# Altium PCB MOTHERBOARD.PcbDoc (part 1 of 3)
Units mm, origin at the board's own origin, x right, y up, seen from the top; angles counter-clockwise.
Board outline 187.14 x 77.14 mm, 4 copper layers (Top Layer, Top, Mid-Layer 1, Mid-Layer 2, Bottom Layer, Bottom), stack 0.462 mm thick; 249 components, 227 nets, 1108 pads, 518 vias.
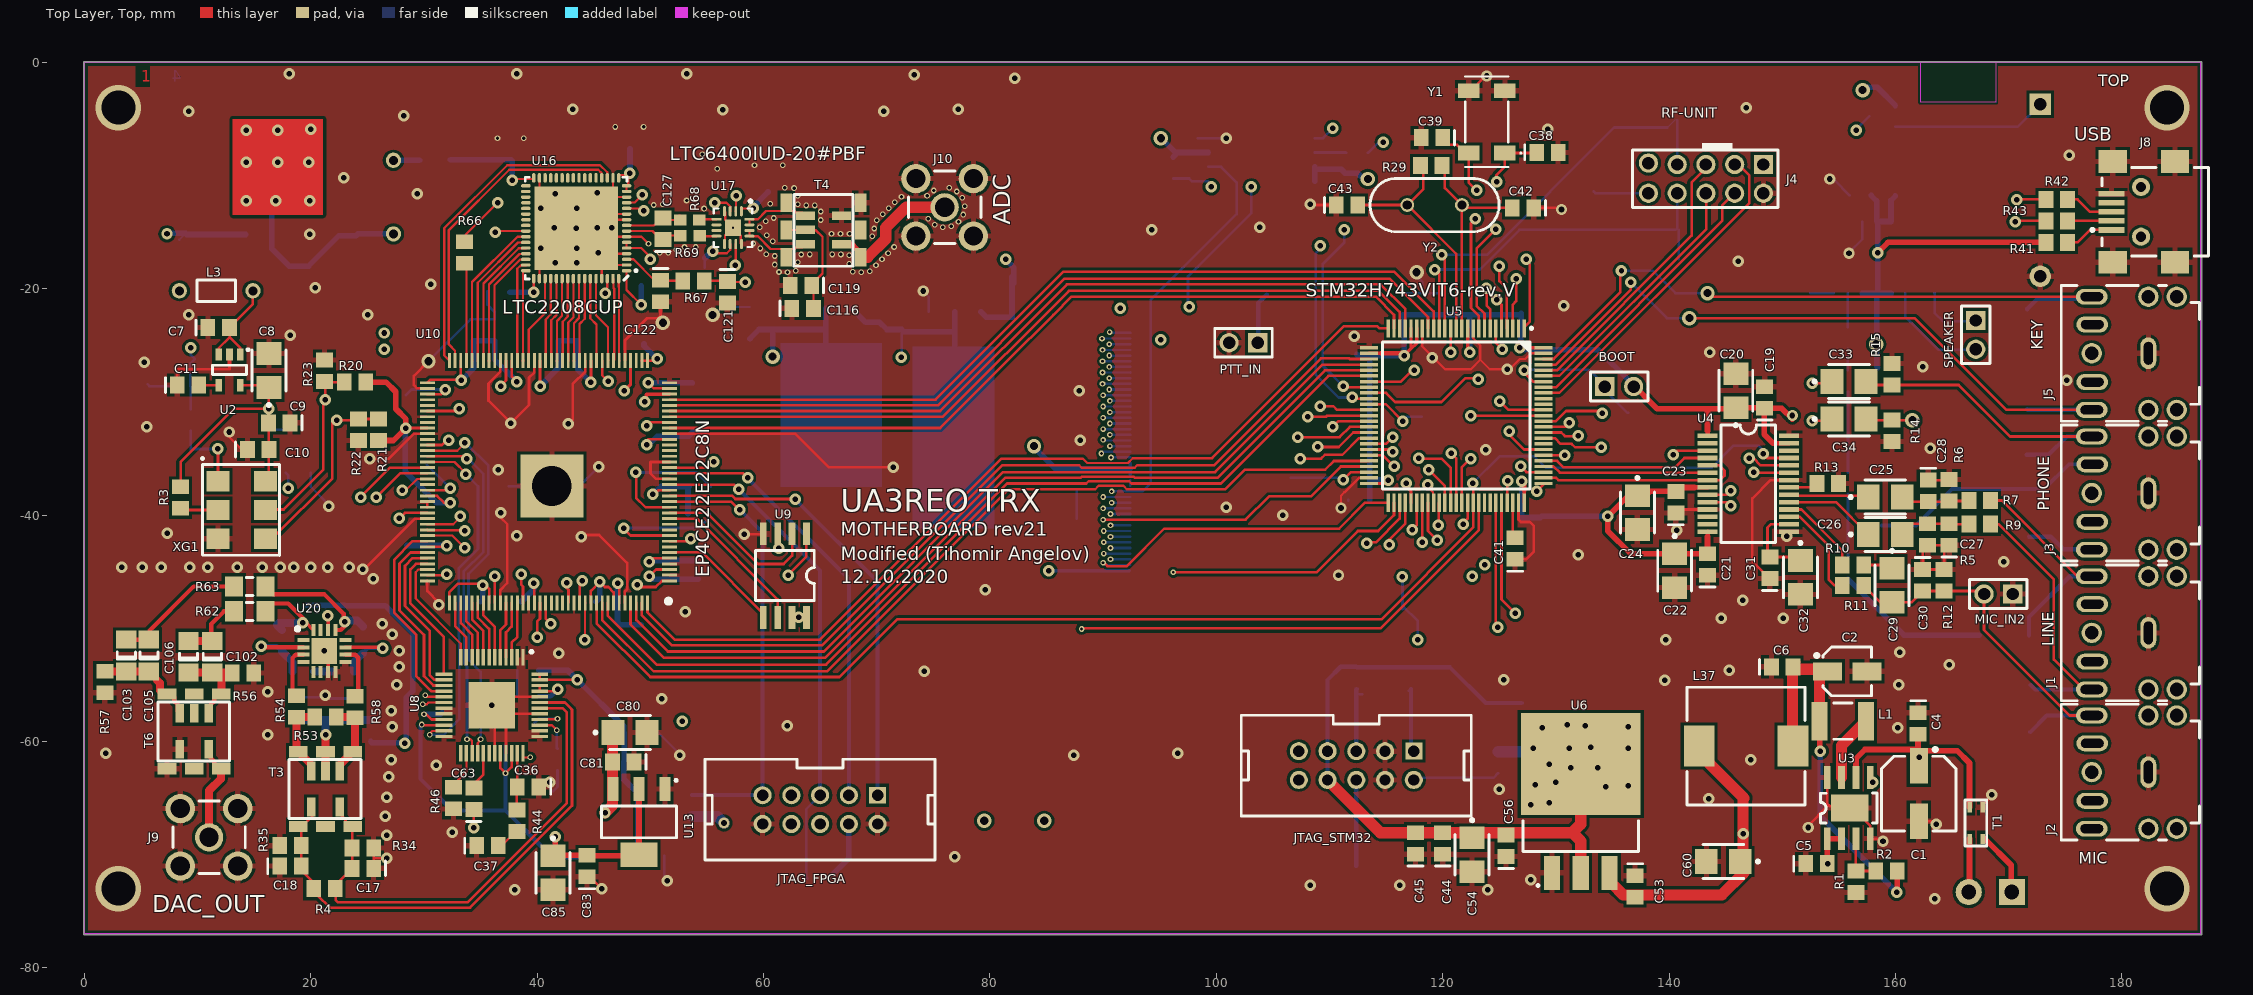
[diagram p0: Top Layer, Top view]
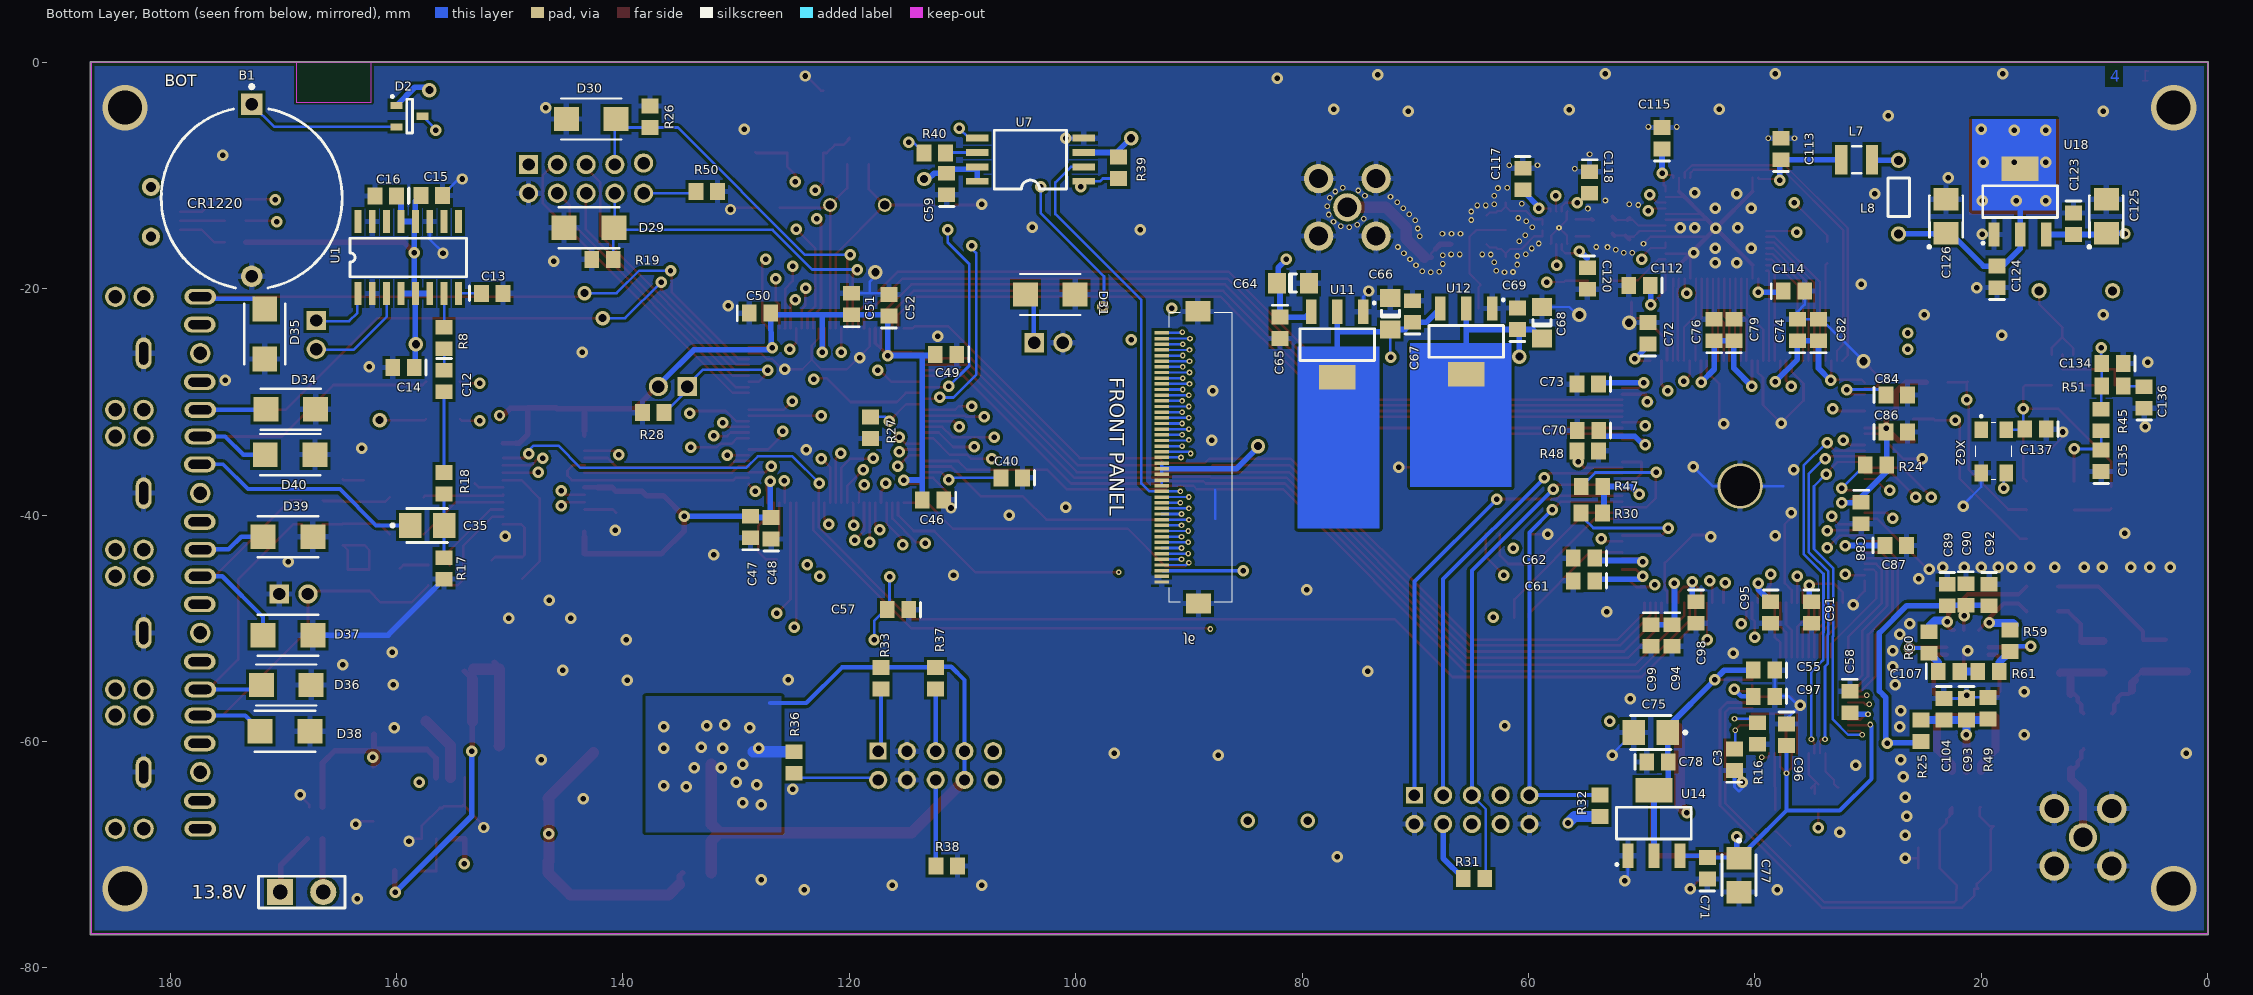
[diagram p1: Bottom Layer, Bottom view, seen from below]
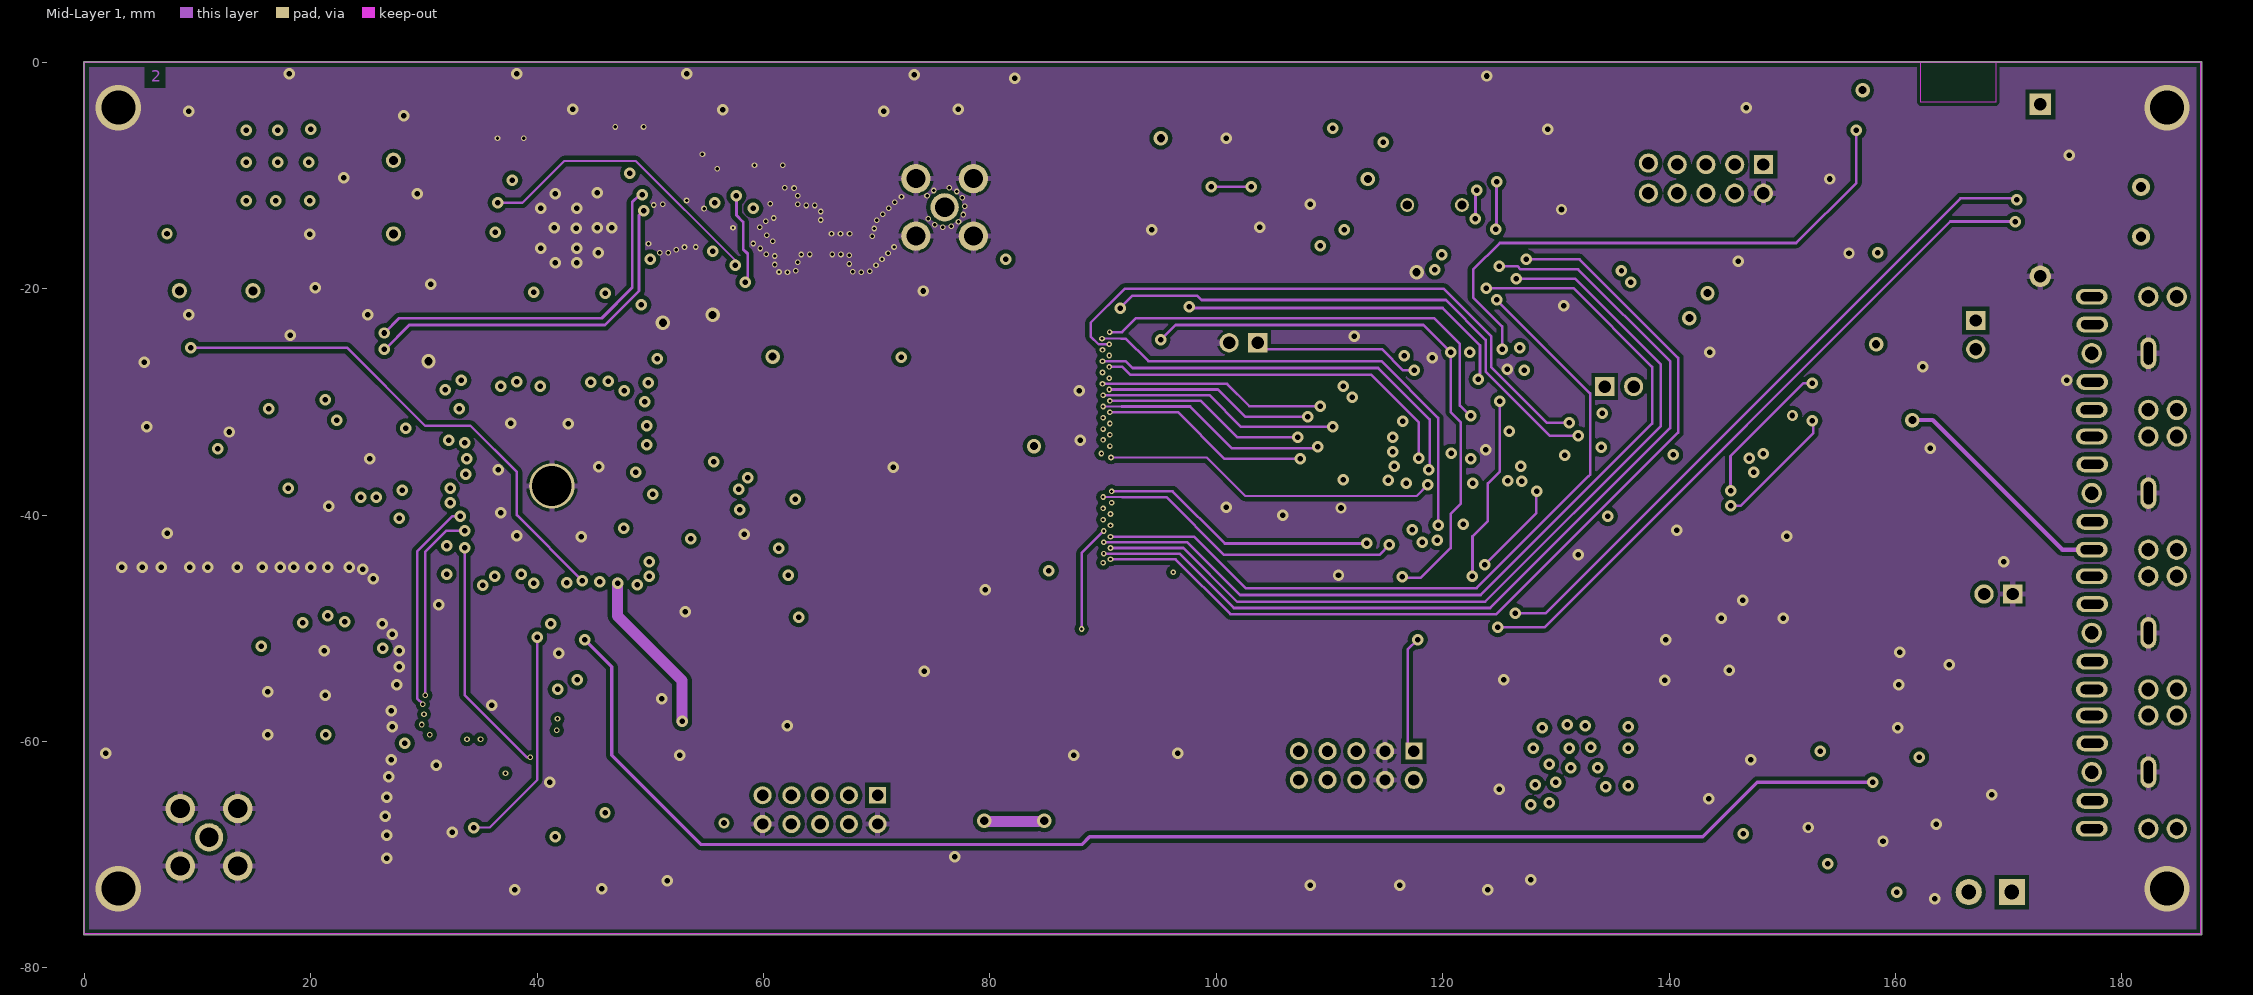
[diagram p2: Mid-Layer 1]
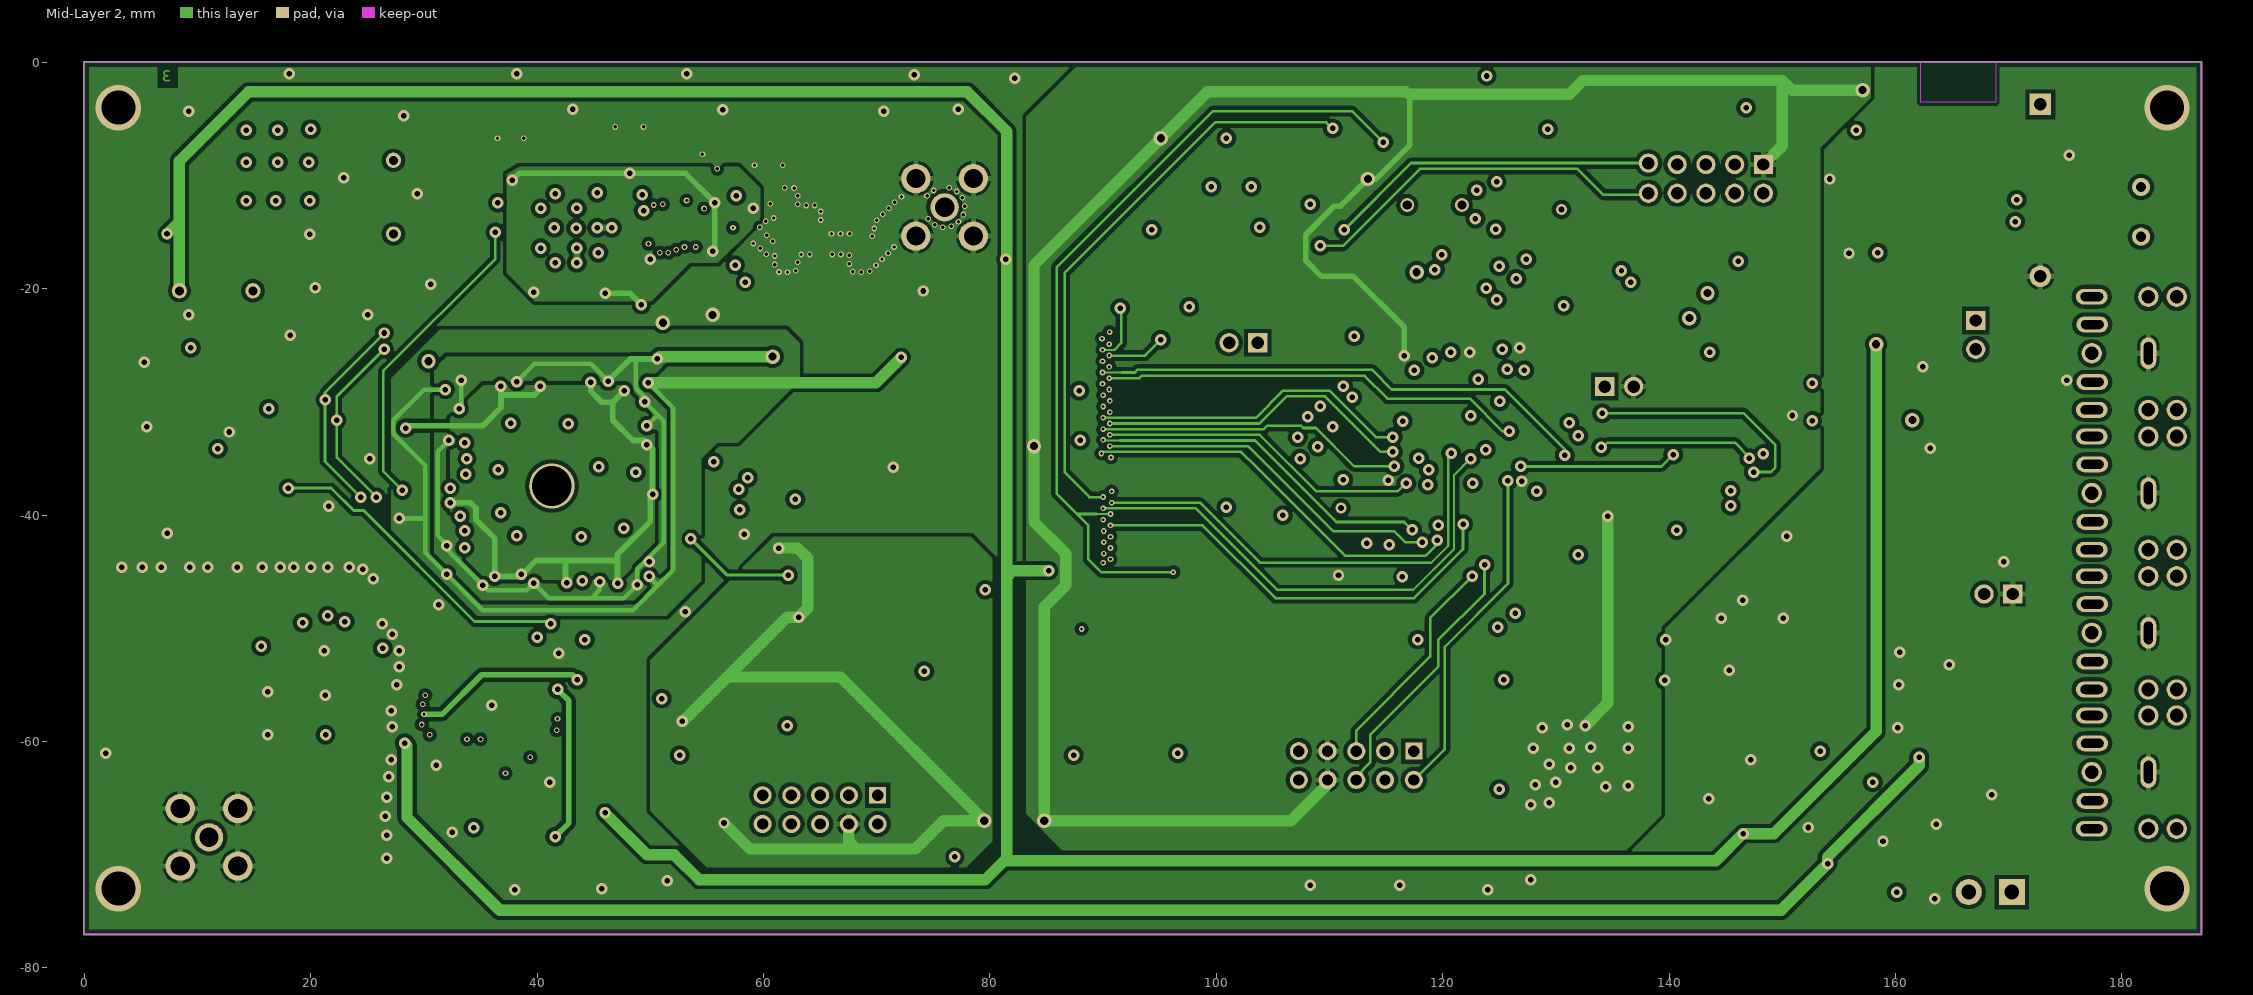
[diagram p3: Mid-Layer 2]

## Layer stack, top to bottom
Top Solder, Top Mask: solder mask 0.0102, Solder Resist, Dk 3.5
Top Layer, Top: signal copper 0.0356
Dielectric 1: dielectric 0.32, FR-4, Dk 4.8
Mid-Layer 1: signal copper 0.0356
Mid-Layer 2: signal copper 0.0356
Bottom Layer, Bottom: signal copper 0.0356
Bottom Solder, Bot Mask: solder mask 0.0102, Solder Resist, Dk 3.5

## Board outline
-0.07,-77 ccw(c0,-77) 0,-77.07 187,-77.07 ccw(c187,-77) 187.07,-77 187.07,0 ccw(c187,0) 187,0.07 0,0.07 ccw(c0,0) -0.07,0

## Design rules (kind name [scope] priority, off if disabled: settings)
BoardOutlineClearance [All] p1: gap=0.2 ignorepadtopadclearanceinfootprint=FALSE except(0: Track-OutlineEdge; 0.4: Arc-SplitBarrior Arc-SplitContinuation Track-SplitBarrior Track-SplitContinuation SMDPad-SplitBarrior SMDPad-SplitContinuation THPad-SplitBarrior THPad-SplitContinuation Via-SplitBarrior Via-SplitContinuation Fill-SplitBarrior Fill-SplitContinuation Poly-SplitBarrior Poly-SplitContinuation Region-SplitBarrior Region-SplitContinuation Text-SplitBarrior Text-SplitContinuation)
Clearance Clearance_1 [All] p1: gap=0.15 ignorepadtopadclearanceinfootprint=FALSE
Clearance "Clearance Bottom Layer" [OnLayer('Bottom Layer')] p2: gap=0.203 ignorepadtopadclearanceinfootprint=TRUE except(0.254: Arc-Text Track-Text SMDPad-Text THPad-Text Via-Text Fill-Text Poly-Text Region-Text Text-Text)
Clearance "Clearance Top Layer" [OnLayer('Top Layer')] p3: gap=0.203 ignorepadtopadclearanceinfootprint=TRUE except(0.254: Arc-Text Track-Text SMDPad-Text THPad-Text Via-Text Fill-Text Poly-Text Region-Text Text-Text)
Clearance [All] p4: gap=0.2 ignorepadtopadclearanceinfootprint=FALSE except(0.089: Arc-Arc Arc-Track Arc-SMDPad Track-Track Track-SMDPad SMDPad-SMDPad; 0.127: Arc-Via Track-Via SMDPad-Via THPad-Via Via-Via; 0.254: Arc-Text Track-Text SMDPad-Text THPad-Text Via-Text Fill-Text Poly-Text Region-Text Text-Text)
HoleSize [All] p1: absolutevalues=TRUE maxlimit=6.3 minlimit=0.2 maxpercent=80.000 minpercent=20.000
MinimumAnnularRing [All] p1: minimumring=0.076
MinimumSolderMaskSliver [All] p1: minsoldermaskwidth=0.01
PolygonConnect PolygonConnect_1 [All] p1: thpad.connectstyle=Relief thpad.reliefconductorwidth=0.508 thpad.reliefentries=4 thpad.polygonreliefangle="90 Angle" thpad.airgapwidth=0.254 smdpad.connectstyle=Relief smdpad.reliefconductorwidth=0.508 smdpad.reliefentries=4 smdpad.polygonreliefangle="90 Angle" smdpad.airgapwidth=0.254 via.connectstyle=Direct via.reliefconductorwidth=0.508 via.reliefentries=4 via.polygonreliefangle="90 Angle" via.airgapwidth=0.254
RoutingCorners [All] p1: cornerstyle=Round minsetback=2.54 maxsetback=2.54
RoutingVias [All] p1: holewidth=0.5 width=1 viastyle="Through Hole" minholewidth=0.2 minwidth=0.45 maxholewidth=1 maxwidth=2
SilkToSilkClearance [All] p1: silktosilkclearance=0.01
SilkToSolderMaskClearance [IsPad] p1: minsilkscreentomaskgap=0.01 clearancetoexposedcopper=TRUE
SolderMaskExpansion [All] p1: expansion=0.102
Width [All] p1: maxlimit=2.54 minlimit=0.089 preferedwidth=0.381
25 further rules are at their usual default settings.

## Classes and differential pairs
component class STM32: B1 BOOT C38 C39 C40 C41 C42 C43 C51 C52 C57 C59 D2 J8 JTAG_STM32 R27 R28 R29 R33 R36 R37 R38 R39 R40 R41 R42 R43 U5 U7 Y1 Y2
component class POWER: 13.8V C1 C2 C4 C5 C6 C44 C45 C46 C47 C48 C49 C50 C53 C54 C56 C60 C64 C65 C66 C67 C68 C69 L1 L37 R1 R2 T1 U3 U6 U11 U12
component class FPGA: C61 C62 C70 C72 C73 C74 C76 C79 C82 C84 C86 C87 C88 C91 C94 C95 C98 C99 JTAG_FPGA R24 R30 R31 R32 R47 R48 U9 U10
component class CONNECTIONS: D29 D30 D31 D34 D35 J4 J5 J6 PTT_IN R19 R26 R50
component class CLOCK_GENERATOR: C7 C8 C9 C10 C11 C134 C135 C136 C137 L3 R3 R20 R21 R22 R23 R45 R51 U2 XG1 XG2
component class "AUDIO CODEC": C12 C13 C14 C15 C16 C19 C20 C21 C22 C23 C24 C25 C26 C27 C28 C29 C30 C31 C32 C33 C34 C35 D36 D37 D38 D39 D40 J1 J2 J3 MI?_IN2 MIС_IN2 MI裚IN2 R5 R6 R7 R8 R9 R10 R11 R12 R13 R14 R15 R17 R18 SPEAKER U1 U4
component class ADC: C112 C113 C114 C115 C116 C117 C118 C119 C120 C121 C122 C123 C124 C125 C126 C127 J10 L7 L8 R66 R67 R68 R69 T4 U16 U17 U18
component class DAC: C3 C17 C18 C36 C37 C55 C58 C63 C71 C75 C77 C78 C80 C81 C83 C85 C89 C90 C92 C93 C96 C97 C102 C103 C104 C105 C106 C107 J9 R4 R16 R25 R34 R35 R44 R46 R49 R53 R54 R56 R57 R58 R59 R60 R61 R62 R63 T3 T6 U8 U13 U14 U20

## Components (designator, comment, footprint, x,y, rotation, side; value= is the part's Value field where it differs from the comment)
13.8V "JX2" JX2 168.383,-73.3 r180 bottom
B1 "CR1220" BR1632A/FA 172.8,-10.871 r270 bottom
BOOT "" 51022-0200 135.6,-28 r0 top
C1 "4.7uF 16V" CAPAE_6.6x6.6h5.4 162.067,-64.514 r270 top
C2 "22uF 10V" CAPAE_4.3x4.3h5.4#1 155.75,-53.8 r0 top
C3 "100n" CAP_0805 41.8,-61.8 r90 bottom
C4 "100n" CAP_0805 162,-58.2 r270 top
C5 "100n" CAP_0805 152.819,-70.796 r0 top
C6 "100n" CAP_0805 149.8,-53.4 r0 top
C7 "1uF" CAP_0805 11.659,-23.428 r0 top
C8 "10uF 10V" CAPAE_4.3x4.3h5.4#2 16.3,-27.618 r90 top
C9 "100n" CAP_0805 17.421,-31.841 r180 top
C10 "470pf" CAP_0805 15.15,-34.2 r0 top
C11 "1uF" CAP_0805 8.958,-28.505 r0 top
C12 "1uF" CAP_0805 155.8,-27.95 r270 bottom
C13 "100n" CAP_0805 151.75,-20.4 r180 bottom
C14 "1uF" CAP_0805 159.189,-26.955 r0 bottom
C15 "1uF" CAP_0805 157.1,-11.75 r180 bottom
C16 "100n" CAP_0805 160.75,-11.8 r0 bottom
C17 "NONE" CAP_0805 24.8,-71.2 r180 top
C18 "NONE" CAP_0805 18,-71 r0 top
C19 "100n" CAP_0805 148.45,-29.8 r90 top
C20 "10uF 10V" CAPAE_4.3x4.3h5.4#2 145.9,-29.4 r90 top
C21 "100n" CAP_0805 143.4,-44.55 r90 top
C22 "10uF 10V" CAPAE_4.3x4.3h5.4#2 140.5,-44.5 r270 top
C23 "100n" CAP_0805 140.6,-39.05 r90 top
C24 "10uF 10V" CAPAE_4.3x4.3h5.4#2 137.2,-39.369 r270 top
C25 "1uF 10V" CAPAE_4.3x4.3h5.4#2 158.7,-38.4 r0 top
C26 "1uF 10V" CAPAE_4.3x4.3h5.4#2 158.7,-41.7 r0 top
C27 "220pF" CAP_0805 164.75,-41.9 r90 top
C28 "220pF" CAP_0805 162.9,-37.65 r270 top
C29 "1uF 10V" CAPAE_4.3x4.3h5.4#2 159.7,-45.8 r270 top
C30 "220pF" CAP_0805 162.4,-45.55 r270 top
C31 "100n" CAP_0805 148.9,-44.85 r90 top
C32 "10uF 10V" CAPAE_4.3x4.3h5.4#2 151.6,-45.1 r270 top
C33 "220uF 10V" CAPAE_4.3x4.3h5.4#2 155.5,-28.2 r0 top
C34 "220uF 10V" CAPAE_4.3x4.3h5.4#2 155.5,-31.5 r0 top
C35 "1uF 10V" CAPAE_4.3x4.3h5.4#2 157.7,-40.9 r180 bottom
C36 "68p" CAP_0805 39.4,-64 r180 top
C37 "10n" CAP_0805 35.4,-69.2 r0 top
C38 "6pF" CAP_0805 129.05,-7.95 r0 top
C39 "6pF" CAP_0805 119.25,-6.65 r180 top
C40 "10uF" CAP_0805 105.449,-36.7 r0 bottom
C41 "10uF" CAP_0805 126.4,-43.15 r90 top
C42 "22pF" CAP_0805 127.3,-12.85 r180 top
C43 "22pF" CAP_0805 111.35,-12.6 r0 top
C44 "100nF" CAP_0805 120,-69.2 r90 top
C45 "100nF" CAP_0805 117.6,-69.2 r90 top
C46 "100nF" CAP_0805 112.401,-38.647 r0 bottom
C47 "100nF" CAP_0805 128.729,-41.256 r90 bottom
C48 "100nF" CAP_0805 126.9,-41.35 r90 bottom
C49 "100nF" CAP_0805 111.25,-25.8 r0 bottom
C50 "10uF" CAP_0805 128.1,-22.15 r180 bottom value=1uF
C51 "100nF" CAP_0805 119.8,-21.55 r90 bottom
C52 "10uF" CAP_0805 116.5,-21.65 r90 bottom
C53 "100nF" CAP_0805 137,-72.6 r270 top
C54 "10uF 9V" CAPAE_4.3x4.3h5.4#2 122.6,-69.6 r270 top
C55 "100n" CAP_0805 39,-53.7 r0 bottom
C56 "100nF" CAP_0805 125.6,-69.4 r90 top
C57 "100nF" CAP_0805 115.5,-48.35 r0 bottom
C58 "100n" CAP_0805 31.6,-56.3 r270 bottom
C59 "100nF" CAP_0805 111.395,-10.945 r90 bottom
C60 "10uF 9V" CAPAE_4.3x4.3h5.4#2 145.2,-70.6 r180 top
C61 "100n" CAP_0805 54.9,-45.8 r0 bottom
C62 "100n" CAP_0805 54.9,-43.8 r0 bottom
C63 "10n" CAP_0805 34.4,-65.25 r90 top
C64 "10uF" C0805 80.8,-19.5 r180 bottom
C65 "100n" CAP_0805 81.951,-23.25 r270 bottom
C66 "10uF" C0805 72.2,-22.2 r90 bottom
C67 "100n" CAP_0805 70.25,-22.2 r90 bottom
C68 "10uF" C0805 58.8,-23 r90 bottom
C69 "100n" CAP_0805 60.978,-22.85 r90 bottom
C70 "100n" CAP_0805 54.536,-32.518 r0 bottom
C71 "100n" CAP_0805 44.2,-71.4 r90 bottom
C72 "100n" CAP_0805 49.433,-24.132 r90 bottom
C73 "100n" CAP_0805 54.554,-28.427 r0 bottom
C74 "100n" CAP_0805 36.241,-23.849 r90 bottom
C75 "10uF" EEEFC_sizeB 48.8,-59.2 r0 bottom
C76 "100n" CAP_0805 43.587,-23.849 r90 bottom
C77 "10uF" EEEFC_sizeB 41.4,-71.4 r270 bottom
C78 "100n" CAP_0805 48.8,-61.8 r180 bottom
C79 "100n" CAP_0805 41.851,-23.849 r90 bottom
C80 "10uF" EEEFC_sizeB 47.8,-59.2 r0 top
C81 "100n" CAP_0805 47.8,-61.8 r180 top
C82 "100n" CAP_0805 34.378,-23.849 r90 bottom
C83 "100n" CAP_0805 44.4,-71.2 r90 top
C84 "100n" CAP_0805 27.658,-29.385 r180 bottom
C85 "10uF" EEEFC_sizeB 41.4,-71.2 r270 top
C86 "100n" CAP_0805 27.658,-32.648 r180 bottom
C87 "100n" CAP_0805 27.755,-42.674 r180 bottom
C88 "100n" CAP_0805 30.6,-39.6 r270 bottom
C89 "100n" CAP_0805 23,-46.85 r270 bottom
C90 "470p" CAP_0805 21.35,-46.8 r270 bottom
C91 "100n" CAP_0805 35,-48.4 r270 bottom
C92 "1uF" CAP_0805 19.3,-46.85 r270 bottom
C93 "100n" CAP_0805 21.3,-56.95 r270 bottom
C94 "100n" CAP_0805 47.311,-50.421 r270 bottom
C95 "100n" CAP_0805 38.6,-48.4 r270 bottom
C96 "100n" CAP_0805 37.2,-59.2 r270 bottom
C97 "100n" CAP_0805 39,-56 r0 bottom
C98 "100n" CAP_0805 45.2,-48.4 r270 bottom
C99 "100n" CAP_0805 49.177,-50.421 r270 bottom
C102 "1uF" CAP_1206 11.3,-52.5 r90 top
C103 "1uF" CAP_1206 3.7,-52.4 r90 top
C104 "470p" CAP_0805 23.3,-56.95 r270 bottom
C105 "680pF" CAP_1206 5.7,-52.4 r90 top
C106 "680pF" CAP_1206 9.2,-52.5 r90 top
C107 "100n" CAP_0805 23.05,-53.8 r180 bottom
C112 "100n" CAP_0805 50,-19.7 r0 bottom
C113 "100n" CAP_0805 37.7,-7.85 r90 bottom
C114 "100n" CAP_0805 36.75,-20.2 r180 bottom
C115 "100n" CAP_0805 48.2,-6.9 r90 bottom
C116 "470pF" CAP_0805 63.254,-21.727 r0 top
C117 "100n" CAP_0805 60.5,-10.1 r270 bottom
C118 "100n" CAP_0805 54.6,-10.4 r270 bottom
C119 "1uF" CAP_0805 63.5,-19.7 r180 top
C120 "100n" CAP_0805 54.8,-18.9 r270 bottom
C121 "1uF" CAP_0805 56.8,-20.1 r270 top
C122 "1uF" CAP_0805 50.9,-20 r270 top
C123 "100n" CAP_0805 11.846,-14.05 r270 bottom
C124 "100n" CAP_0805 18.604,-19.146 r90 bottom
C125 "22uF" TC3528-1411 8.946,-13.6 r90 bottom
C126 "22uF" TC3528-1411 23.1,-13.6 r90 bottom
C127 "10pF" CAP_0805 51.1,-14.9 r90 top
C134 "1nF" CAP_0805 8.2,-26.6 r0 bottom
C135 "100n" CAP_0805 9.4,-35.4 r90 bottom
C136 "8.2nF" CAP_0805 5.6,-29.8 r90 bottom
C137 "10n" CAP_0805 15,-32.4 r0 bottom
D2 "BAT54C" BAT54C 158.872,-4.535 r180 bottom
D29 "SMAJ5.0A-TR" SMBJ36CATR 143,-14.6 r0 bottom
D30 "SMAJ5.0A-TR" SMBJ36CATR 142.8,-5 r0 bottom
D31 "SMAJ5.0A-TR" SMBJ36CATR 102.25,-20.5 r180 bottom
D34 "SMAJ5.0A-TR" SMBJ36CATR 169.35,-30.65 r180 bottom
D35 "SMAJ5.0A-TR" SMBJ36CATR 171.65,-24 r270 bottom
D36 "SMAJ5.0A-TR" SMBJ36CATR 169.75,-55 r180 bottom
D37 "SMAJ5.0A-TR" SMBJ36CATR 169.6,-50.6 r180 bottom
D38 "SMAJ5.0A-TR" SMBJ36CATR 169.85,-59.1 r180 bottom
D39 "SMAJ5.0A-TR" SMBJ36CATR 169.6,-41.9 r180 bottom
D40 "SMAJ5.0A-TR" SMBJ36CATR 169.4,-34.65 r180 bottom
J1 "SJ1-3525NG" SJ1-3525NG 181.839,-50.4 r180 top value=LINE_IN
J2 "SJ1-3525NG" SJ1-3525NG 181.839,-62.7 r180 top value=MIC_IN
J3 "SJ1-3525NG" SJ1-3525NG 181.839,-38.05 r180 top value=PHONE_OUT
J4 "RF-UNIT" 90131-0126 144.53,-10.29 r180 top
J5 "SJ1-3525NG" SJ1-3525NG 181.839,-25.7 r180 top value=KEY_IN
J6 "FPC-45P-0.5mm" FH12S45S05SH60 91.75,-34.9 r90 bottom
J8 "USB" 2-1734035-3 182.4,-13.2 r90 top
J9 "DAC_OUT" 31-5431 11.014,-68.465 r0 top
J10 "ADC" 31-5431 76,-12.8 r270 top
JTAG_FPGA "" IDC10 64.999,-66.015 r0 top
JTAG_STM32 "" IDC10 112.37,-62.12 r0 top
L1 "3.3uH" IND_1812 155.35,-58.2 r180 top
L3 "FB" IND_FERRITE_BEAD 11.637,-20.176 r0 top
L7 "100uH" 14-1210 31,-8.6 r0 bottom
L8 "FB" IND_FERRITE_BEAD 27.3,-11.9 r90 bottom
L37 "10uH" IND_FERRITE_CORE 146.8,-60.4 r0 top
MIC_IN2 "MIС_IN2" 51022-0200 169.1,-47.6 r180 top (schematic designator MI裚IN2)
PTT_IN "PTT_IN" 51022-0200 102.4,-25.4 r180 top
R1 "10k" RES_0805 156.511,-72.383 r90 top
R2 "120k+100k" RES_0805 159.21,-71.426 r0 top
R3 "0/NONE" RES_0805 8.5,-38.45 r270 top value=NONE/0
R4 "NONE" RES_0805 21.2,-73 r180 top
R5 "5.6k" RES_0805 162.85,-41.7 r90 top
R6 "5.6k" RES_0805 164.75,-37.8 r270 top
R7 "5.6k" RES_0805 167.45,-38.7 r180 top
R8 "10k" RES_0805 155.8,-24.35 r270 bottom
R9 "5.6k" RES_0805 167.45,-40.8 r180 top
R10 "10k" RES_0805 156.25,-44.4 r180 top
R11 "680" RES_0805 156.25,-46.2 r180 top
R12 "47k" RES_0805 164.3,-45.75 r270 top
R13 "10k" RES_0805 154.028,-37.204 r180 top
R14 "47k" RES_0805 159.7,-32.55 r90 top
R15 "47k" RES_0805 159.7,-27.55 r270 top
R16 "1k" RES_0805 39.75,-59.3 r90 bottom
R17 "47k" RES_0805 155.8,-44.7 r90 bottom
R18 "100" RES_0805 155.8,-37.18 r90 bottom
R19 "1k" RES_0805 141.8,-17.4 r0 bottom
R20 "127" RES_0805 23.9,-28.25 r180 top
R21 "127" RES_0805 26,-32.45 r90 top
R22 "82.5" RES_0805 24.2,-32.45 r270 top
R23 "82.5" RES_0805 21.2,-27.25 r90 top
R24 "10k" RES_0805 29.3,-35.55 r0 bottom
R25 "1k" RES_0805 25.3,-59.05 r270 bottom
R26 "1k" RES_0805 137.6,-4.8 r90 bottom
R27 "10k" RES_0805 118.147,-32.269 r90 bottom
R28 "10k" RES_0805 137.331,-30.947 r180 bottom
R29 "1m" RES_0805 119,-9.1 r180 top
R30 "10k" RES_0805 54.4,-39.8 r180 bottom
R31 "10k" RES_0805 64.8,-72.1 r0 bottom
R32 "10k" RES_0805 53.689,-65.669 r270 bottom
R33 "10k" RES_0805 117.2,-54.4 r90 bottom
R34 "51" RES_0805 24.6,-69.4 r180 top
R35 "51" RES_0805 18.2,-69.2 r0 top
R36 "10k" RES_0805 124.9,-61.85 r270 bottom
R37 "10k" RES_0805 112.4,-54.4 r270 bottom
R38 "10k" RES_0805 111.4,-71 r0 bottom
R39 "10k" RES_0805 96.2,-9.3 r270 bottom
R40 "22" RES_0805 112.445,-7.995 r0 bottom
R41 "NONE" RES_0805 174.25,-15.9 r0 top
R42 "22" RES_0805 174.25,-12.1 r180 top
R43 "22" RES_0805 174.25,-14 r180 top
R44 "200" RES_0805 38.2,-67 r90 top
R45 "18k" RES_0805 9.4,-31.6 r270 bottom
R46 "10k" RES_0805 32.6,-65 r90 top
R47 "10k" RES_0805 54.374,-37.466 r180 bottom
R48 "10k" RES_0805 54.762,-34.311 r180 bottom
R49 "1k" RES_0805 19.4,-57.05 r90 bottom
R50 "1k" RES_0805 132.6,-11.4 r180 bottom
R51 "5.6k" RES_0805 8.4,-28.6 r180 bottom
R53 "220" RES_0805 21.3,-57.85 r180 top
R54 "22" RES_0805 18.75,-56.9 r90 top
R56 "10k" RES_0805 14,-53.95 r180 top
R57 "10k" RES_0805 1.8,-54.75 r270 top
R58 "22" RES_0805 23.9,-56.95 r270 top
R59 "750" RES_0805 17.45,-51.1 r270 bottom
R60 "750" RES_0805 24.6,-51.25 r270 bottom
R61 "330" RES_0805 19.35,-53.8 r0 bottom
R62 "5.6" RES_1206 14.6,-48.5 r0 top
R63 "5.6" RES_1206 14.6,-46.3 r0 top
R66 "1.5k" RES_0805 33.6,-16.8 r270 top
R67 "56" RES_0805 53.8,-19.3 r180 top
R68 "10" RES_0603 53.475,-13.925 r180 top
R69 "10" RES_0603 53.5,-15.3 r180 top
SPEAKER "" 51022-0200 167.735,-24.07 r270 top
T1 "ACP3225-501-2P-T" TRANSF_ICORE 167.11,-67.19 r270 top
T3 "1:1 T1-6T" TRANSF_ACORE2 21.3,-64.2 r270 top
T4 "1:4 ADT4-6T" TRANSF_ACORE2 65.3,-14.8 r0 top
T6 "1:1 ADT1-1" TRANSF_ACORE 9.7,-59.1 r270 top
U1 "PAM8403" PAM8403 158.975,-17.235 r90 bottom
U2 "LD3985" LD3985 12.978,-27.123 r270 top
U3 "ST1S10" ST1S10 155.876,-65.874 r90 top
U4 "WM8731" WM8731 147,-37.225 r0 top
U5 "STM32H743VIT6-rev.V" STM32H743VIT6 121.2,-31.2 r270 top
U6 "LM1085-3.3" LM1085-3.3 132.2,-65.3 r90 top
U7 "W25Q16" W25Q16 104,-8.595 r0 bottom
U8 "DAC5674IPHP" QFP50P900X900X100-49N 36,-56.8 r270 top
U9 "25P80" 25P80 61.885,-45.338 r270 top
U10 "EP4CE22E22C8N" QFP144-20-2222A 41.3,-37.3 r180 top
U11 "AMS1117-2V5" AMS1117 76.815,-24.928 r270 bottom
U12 "AMS1117-1V2" AMS1117 65.415,-24.645 r270 bottom
U13 "LD1117-3.3" LT1117CST-3.3 49.085,-67.1 r270 top
U14 "LD1117-1.8" LT1117CST-3.3 49,-67.2 r90 bottom
U16 "LTC2208CUP" LTC2208CUP 43.753,-14.65 r180 top
U17 "LTC6400IUD-20#PBF" LT-UD-16_N 57.3,-14.6 r270 top
U18 "LD1117-3.3" LT1117CST-3.3 16.646,-12.3 r90 bottom
U20 "OPA2673IRGVT" QFN65P400X400X100-17N-D 21.2,-52 r0 top
XG1 "122.88Mhz" NV7050SA 13.748,-39.17 r0 top
XG2 "12.288Mhz TCXO 3.3v TTL/CMOS (set other freq in fpga code)" 581L200X2ITT 18.896,-34.354 r270 bottom
Y1 "ABS25-32.768KHZ-6-T" ABS25 123.9,-5.25 r90 top
Y2 "8mhz" ECS-200-20-1 119.287,-12.6 r180 top

## Footprints (in the part's own frame and the unit in brackets; to place one, negate y for a bottom-side part, rotate by r counter-clockwise, add the part's x,y. Pads: shape width x height; smd on the part's side, far side on the other; paste and mask are expansions set on the pad)
2-1734035-3 [mm]
  rect 0.5x2.3 smd: 1(-1.6,3.3) 2(-0.8,3.3) 3(0,3.3) 4(0.8,3.3) 5(1.6,3.3)
  rect 2x2.5 smd: 6(-4.45,3.2) 7(4.45,3.2) 8(-4.45,-2.3) 9(4.45,-2.3)
  round 1.6 hole 0.9: 10(-2.2,0.7) 11(2.201,0.7)
  silkscreen extent -3.9,-5.25 3.9,5.25
14-1210 [mm] "Chip Resistor, Body 3.2x2.5mm, IPC High Density"
  rect 1.1x2.6 smd: 1(-1.35,0) 2(1.35,0)
  silkscreen extent -0.4,-1.2 0.4,1.2, body extent -1.68,-1.32 1.68,1.32, height 0.9
25P80 [mm]
  rect 2x0.6 smd: 1(-3.7,1.905) 2(-3.7,0.635) 3(-3.7,-0.635) 4(-3.7,-1.905) 5(3.7,-1.905) 6(3.7,-0.635) 7(3.7,0.635) 8(3.7,1.905)
  silkscreen extent -2.2,-2.6 2.2,2.6
31-5431 [mm]
  round 2.6 hole 1.7: 1(-2.54,-2.54) 2(2.54,-2.54) 3(2.54,2.54) 4(-2.54,2.54)
  round 2.5 hole 1.7: 5(0,0)
  silkscreen extent -3.2,-3.2 3.2,3.2
581L200X2ITT [mm]
  rect 1.5x1.2 smd: 1(-1.9,-1.1) 2(1.9,-1.1) 3(1.9,1.1) 4(-1.9,1.1)
  silkscreen extent -3.2,-1.6 2.5,1.6, body extent -2.53,-1.6 2.53,1.6, height 1.75
51022-0200 [mm]
  rect 1.7x1.7 hole 1.1: 1(-1.27,-0.635)
  round 1.7 hole 1.1: 2(1.27,-0.635)
  silkscreen extent -2.54,-1.91 2.54,0.64
90131-0126 [mm]
  rect 1.7x1.7 hole 1.1: 1(-3.81,-1.27)
  round 1.7 hole 1.1: 2(-3.81,1.27) 3(-1.27,-1.27) 4(-1.27,1.27) 5(1.27,-1.27) 6(1.27,1.27) 7(3.81,-1.27) 8(3.81,1.27) 9(6.35,-1.397) 10(6.35,1.27)
  silkscreen extent -5.08,-2.54 7.75,2.54
ABS25 [mm]
  rect 1.3x1.9 smd: 1(-2.75,-1.6) 2(2.75,-1.6) 3(2.75,1.6) 4(-2.75,1.6)
  silkscreen extent -4,-3.03 4,1.9
AMS1117 [mm]
  rect 2.15x0.95 smd: 1(-2.9,2.215) 2(-2.9,-0.085) 3(-2.9,-2.385)
  rect 2.15x3.25 smd: 4(2.9,-0.085)
  silkscreen extent -3.86,-3.38 1.4,3.38
BAT54C [mm]
  rect 1.05x0.65 smd: 1(-1.128,0.735) 2(-1.128,-1.165) 3(1.172,-0.215)
  silkscreen extent -1.7,-1.71 0.27,1.71
BR1632A/FA [mm]
  rect 1.9x1.9 hole 1.1: 1(-7.171,0)
  round 1.9 hole 1.1: 2(8.029,0)
  silkscreen extent -9.03,-8 9.04,8
C0805 [mm]
  rect 1.6x1.8 smd: 1(-1.4,0) 2(1.4,0)
  silkscreen extent -0.3,-0.8 0.3,0.8
CAP_0805 [mm]
  rect 1.3x1.5 smd: 1(-0.75,0) 2(1.15,0)
  silkscreen extent -1.8,-0.65 -1.8,0.65
CAP_1206 [mm]
  rect 1.6x1.8 smd: 1(-1.4,0) 2(1.4,0)
  silkscreen extent -0.3,-0.8 0.3,0.8
CAPAE_4.3x4.3h5.4#1 [mm]
  rect 2.55x1.6 smd: 1(-1.75,0) 2(1.75,0)
  silkscreen extent -3,-2.15 2.15,2.15
CAPAE_4.3x4.3h5.4#2 [mm]
  rect 2x2.2 smd: 1(-1.1,0) 2(1.9,0)
  silkscreen extent -2.9,-1.5 2.2,1.5
CAPAE_6.6x6.6h5.4 [mm]
  rect 3.15x1.6 smd: 1(-2.362,0) 2(2.538,0)
  silkscreen extent -4.11,-3.3 3.39,3.3
ECS-200-20-1 [mil]
  round 48 hole 32: 1(-95,0) 2(95,0)
  silkscreen extent -225,-93 225,93
EEEFC_sizeB [mm]
  rect 2x2.2 smd: 1(-1.1,0) 2(1.9,0)
  silkscreen extent -2.9,-1.5 2.2,1.5
FH12S45S05SH60 [mm]
  rect 0.3x1.3 smd: 1(11,0.65) 2(10.5,0.65) 3(10,0.65) 4(9.5,0.65) 5(9,0.65) 6(8.5,0.65) 7(8,0.65) 8(7.5,0.65) 9(7,0.65) 10(6.5,0.65) 11(6,0.65) 12(5.5,0.65) 13(5,0.65) 14(4.5,0.65) 15(4,0.65) 16(3.5,0.65) 17(3,0.65) 18(2.5,0.65) 19(2,0.65) 20(1.5,0.65) 21(1,0.65) 22(0.5,0.65) 23(0,0.65) 24(-0.5,0.65) 25(-1,0.65) 26(-1.5,0.65) 27(-2,0.65) 28(-2.5,0.65) 29(-3,0.65) 30(-3.5,0.65) 31(-4,0.65) 32(-4.5,0.65) 33(-5,0.65) 34(-5.5,0.65) 35(-6,0.65) 36(-6.5,0.65) 37(-7,0.65) 38(-7.5,0.65) 39(-8,0.65) 40(-8.5,0.65) 41(-9,0.65) 42(-9.5,0.65) 43(-10,0.65) 44(-10.5,0.65) 45(-11,0.65)
  rect 1.8x2.2 smd: 46(-12.9,-2.6) 47(12.9,-2.54)
  silkscreen extent -12.8,-5.6 12.8,0, body extent -13.62,-5.6 13.62,1.27, height 2.1
IDC10 [mm]
  rect 1.5x1.5 hole 1: 1(5.08,1.27)
  round 1.6 hole 1: 2(5.08,-1.27) 3(2.54,1.27) 4(2.54,-1.27) 5(0,1.27) 6(0,-1.27) 7(-2.54,1.27) 8(-2.54,-1.27) 9(-5.08,1.27) 10(-5.08,-1.27)
  silkscreen extent -10.16,-4.44 10.16,4.44
IND_1812 [mm]
  rect 1.4x3.4 smd: 1(-2.05,0) 2(2.05,0)
  silkscreen extent -0.8,-1.6 0.8,1.6
IND_FERRITE_BEAD [mm]
  round 1.35 hole 0.8: 1(-3.25,0) 2(3.25,0)
  silkscreen extent -1.7,-0.95 1.7,0.95
IND_FERRITE_CORE [mm]
  rect 2.7x3.6 smd: 1(-4.15,0) 2(4.15,0)
  silkscreen extent -5.2,-5.2 5.2,5.2
JX2 [mm]
  rect 2.3x2.3 hole 1.3: 1(-1.905,0)
  round 2.3 hole 1.3: 2(1.905,0)
  silkscreen extent -3.81,-1.4 3.81,1.4
LD3985 [mm]
  rect 1.1x0.6 smd: 1(-1.316,0.785) 2(-1.316,-0.165) 3(-1.316,-1.115) 4(1.384,-1.115) 5(1.384,0.785)
  silkscreen extent -1.93,-1.66 0.43,1.66
LM1085-3.3 [mm]
  rect 3x1.45 smd: 1(-6.3,2.54) 2(-6.3,0) 3(-6.3,-2.54)
  rect 9x10.6 smd: 4(3.3,0)
  silkscreen extent -7.61,-5.1 -1.7,5.1
LT1117CST-3.3 [mm]
  rect 2.15x0.95 smd: 1(-2.9,2.215) 2(-2.9,-0.085) 3(-2.9,-2.385)
  rect 2.15x3.25 smd: 4(2.9,-0.085)
  silkscreen extent -3.86,-3.38 1.4,3.38
LT-UD-16_N [mm] "QFN, 16-Leads, Body 3x3mm, Pitch 0.5mm, Thermal Pad 1.45x1.45mm, IPC Medium Density"
  oval 0.9x0.25 smd: 1(-1.45,0.75) 2(-1.45,0.25) 3(-1.45,-0.25) 4(-1.45,-0.75) 9(1.45,-0.75) 10(1.45,-0.25) 11(1.45,0.25) 12(1.45,0.75)
  oval 0.25x0.9 smd: 5(-0.75,-1.45) 6(-0.25,-1.45) 7(0.25,-1.45) 8(0.75,-1.45) 13(0.75,1.45) 14(0.25,1.45) 15(-0.25,1.45) 16(-0.75,1.45)
  rect 1.45x1.45 smd: 17(0,0)
  silkscreen extent -2.47,-1.7 1.7,1.7, body extent -1.55,-1.55 1.55,1.55, height 0.8
LTC2208CUP [mm]
  oval 0.85x0.3 smd: 1(-4.147,3.75) 2(-4.147,3.25) 3(-4.147,2.75) 4(-4.147,2.25) 5(-4.147,1.75) 6(-4.147,1.25) 7(-4.147,0.75) 8(-4.147,0.25) 9(-4.147,-0.25) 10(-4.147,-0.75) 11(-4.147,-1.25) 12(-4.147,-1.75) 13(-4.147,-2.25) 14(-4.147,-2.75) 15(-4.147,-3.25) 16(-4.147,-3.75) 33(4.753,-3.75) 34(4.753,-3.25) 35(4.753,-2.75) 36(4.753,-2.25) 37(4.753,-1.75) 38(4.753,-1.25) 39(4.753,-0.75) 40(4.753,-0.25) 41(4.753,0.25) 42(4.753,0.75) 43(4.753,1.25) 44(4.753,1.75) 45(4.753,2.25) 46(4.753,2.75) 47(4.753,3.25) 48(4.753,3.75)
  oval 0.3x0.85 smd: 17(-3.447,-4.45) 18(-2.947,-4.45) 19(-2.447,-4.45) 20(-1.947,-4.45) 21(-1.447,-4.45) 22(-0.947,-4.45) 23(-0.447,-4.45) 24(0.053,-4.45) 25(0.553,-4.45) 26(1.053,-4.45) 27(1.553,-4.45) 28(2.053,-4.45) 29(2.553,-4.45) 30(3.053,-4.45) 31(3.553,-4.45) 32(4.053,-4.45) 49(4.053,4.45) 50(3.553,4.45) 51(3.053,4.45) 52(2.553,4.45) 53(2.053,4.45) 54(1.553,4.45) 55(1.053,4.45) 56(0.553,4.45) 57(0.053,4.45) 58(-0.447,4.45) 59(-0.947,4.45) 60(-1.447,4.45) 61(-1.947,4.45) 62(-2.447,4.45) 63(-2.947,4.45) 64(-3.447,4.45)
  rect 7.4x7.4 smd: 65(0.303,0)
  silkscreen extent -5.18,-4.5 4.8,4.6
NV7050SA [mm]
  rect 2x1.8 smd: 1(-1.948,2.17) 2(-1.948,-0.37) 3(-1.948,-2.91) 4(2.252,-2.91) 5(2.252,-0.37) 6(2.252,2.17)
  silkscreen extent -3.51,-4.38 3.51,4.38
PAM8403 [mm]
  rect 2x0.6 smd: 1(-3.175,4.445) 2(-3.175,3.175) 3(-3.175,1.905) 4(-3.175,0.635) 5(-3.175,-0.635) 6(-3.175,-1.905) 7(-3.175,-3.175) 8(-3.175,-4.445) 9(3.175,-4.445) 10(3.175,-3.175) 11(3.175,-1.905) 12(3.175,-0.635) 13(3.175,0.635) 14(3.175,1.905) 15(3.175,3.175) 16(3.175,4.445)
  silkscreen extent -1.7,-5.15 1.7,5.15
QFN65P400X400X100-17N-D [mm]
  rect 1.05x0.35 smd: 1(-1.85,0.975) 2(-1.85,0.325) 3(-1.85,-0.325) 4(-1.85,-0.975) 9(1.85,-0.975) 10(1.85,-0.325) 11(1.85,0.325) 12(1.85,0.975)
  rect 0.35x1.05 smd: 5(-0.975,-1.85) 6(-0.325,-1.85) 7(0.325,-1.85) 8(0.975,-1.85) 13(0.975,1.85) 14(0.325,1.85) 15(-0.325,1.85) 16(-0.975,1.85)
  rect 2.26x2.26 smd: 17(0,0)
  silkscreen extent -2.54,1.79 -2.21,2.11, body extent -2.05,-2.05 2.05,2.05, height 1
QFP50P900X900X100-49N [mm]
  rect 1.475x0.3 smd: 1(-4.238,2.75) 2(-4.238,2.25) 3(-4.238,1.75) 4(-4.238,1.25) 5(-4.238,0.75) 6(-4.238,0.25) 7(-4.238,-0.25) 8(-4.238,-0.75) 9(-4.238,-1.25) 10(-4.238,-1.75) 11(-4.238,-2.25) 12(-4.238,-2.75) 25(4.238,-2.75) 26(4.238,-2.25) 27(4.238,-1.75) 28(4.238,-1.25) 29(4.238,-0.75) 30(4.238,-0.25) 31(4.238,0.25) 32(4.238,0.75) 33(4.238,1.25) 34(4.238,1.75) 35(4.238,2.25) 36(4.238,2.75)
  rect 0.3x1.475 smd: 13(-2.75,-4.238) 14(-2.25,-4.238) 15(-1.75,-4.238) 16(-1.25,-4.238) 17(-0.75,-4.238) 18(-0.25,-4.238) 19(0.25,-4.238) 20(0.75,-4.238) 21(1.25,-4.238) 22(1.75,-4.238) 23(2.25,-4.238) 24(2.75,-4.238) 37(2.75,4.238) 38(2.25,4.238) 39(1.75,4.238) 40(1.25,4.238) 41(0.75,4.238) 42(0.25,4.238) 43(-0.25,4.238) 44(-0.75,4.238) 45(-1.25,4.238) 46(-1.75,4.238) 47(-2.25,4.238) 48(-2.75,4.238)
  rect 4.1x4.1 smd: 49(0,0)
  silkscreen extent -4.85,3.38 -4.6,3.63, body extent -4.5,-4.5 4.5,4.5, height 1
QFP144-20-2222A [mil]
  rect 52x10 smd: 1(-409.45,334.64) 2(-409.45,314.96) 3(-409.45,295.27) 4(-409.45,275.59) 5(-409.45,255.9) 6(-409.45,236.22) 7(-409.45,216.53) 8(-409.45,196.85) 9(-409.45,177.16) 10(-409.45,157.48) 11(-409.45,137.8) 12(-409.45,118.11) 13(-409.45,98.43) 14(-409.45,78.74) 15(-409.45,59.06) 16(-409.45,39.37) 17(-409.45,19.69) 18(-409.45,0) 19(-409.45,-19.68) 20(-409.45,-39.37) 21(-409.45,-59.06) 22(-409.45,-78.74) 23(-409.45,-98.43) 24(-409.45,-118.11) 25(-409.45,-137.8) 26(-409.45,-157.48) 27(-409.45,-177.17) 28(-409.45,-196.85) 29(-409.45,-216.54) 30(-409.45,-236.22) 31(-409.45,-255.91) 32(-409.45,-275.59) 33(-409.45,-295.28) 34(-409.45,-314.96) 35(-409.45,-334.65) 36(-409.45,-354.33) 73(433.07,-354.33) 74(433.07,-334.65) 75(433.07,-314.96) 76(433.07,-295.28) 77(433.07,-275.59) 78(433.07,-255.91) 79(433.07,-236.22) 80(433.07,-216.54) 81(433.07,-196.85) 82(433.07,-177.17) 83(433.07,-157.48) 84(433.07,-137.8) 85(433.07,-118.11) 86(433.07,-98.43) 87(433.07,-78.74) 88(433.07,-59.06) 89(433.07,-39.37) 90(433.07,-19.68) 91(433.07,0) 92(433.07,19.69) 93(433.07,39.37) 94(433.07,59.06) 95(433.07,78.74) 96(433.07,98.43) 97(433.07,118.11) 98(433.07,137.8) 99(433.07,157.48) 100(433.07,177.16) 101(433.07,196.85) 102(433.07,216.53) 103(433.07,236.22) 104(433.07,255.9) 105(433.07,275.59) 106(433.07,295.27) 107(433.07,314.96) 108(433.07,334.64)
  rect 10x52 smd: 37(-332.68,-431.1) 38(-312.99,-431.1) 39(-293.31,-431.1) 40(-273.62,-431.1) 41(-253.94,-431.1) 42(-234.25,-431.1) 43(-214.57,-431.1) 44(-194.88,-431.1) 45(-175.2,-431.1) 46(-155.51,-431.1) 47(-135.83,-431.1) 48(-116.14,-431.1) 49(-96.46,-431.1) 50(-76.77,-431.1) 51(-57.09,-431.1) 52(-37.4,-431.1) 53(-17.72,-431.1) 54(1.97,-431.1) 55(21.65,-431.1) 56(41.34,-431.1) 57(61.02,-431.1) 58(80.71,-431.1) 59(100.39,-431.1) 60(120.08,-431.1) 61(139.76,-431.1) 62(159.45,-431.1) 63(179.13,-431.1) 64(198.82,-431.1) 65(218.5,-431.1) 66(238.19,-431.1) 67(257.87,-431.1) 68(277.56,-431.1) 69(297.24,-431.1) 70(316.93,-431.1) 71(336.61,-431.1) 72(356.3,-431.1) 109(356.3,411.42) 110(336.61,411.42) 111(316.93,411.42) 112(297.24,411.42) 113(277.56,411.42) 114(257.87,411.42) 115(238.19,411.42) 116(218.5,411.42) 117(198.82,411.42) 118(179.13,411.42) 119(159.45,411.42) 120(139.76,411.42) 121(120.08,411.42) 122(100.39,411.42) 123(80.71,411.42) 124(61.02,411.42) 125(41.34,411.42) 126(21.65,411.42) 127(1.97,411.42) 128(-17.72,411.42) 129(-37.4,411.42) 130(-57.09,411.42) 131(-76.77,411.42) 132(-96.46,411.42) 133(-116.14,411.42) 134(-135.83,411.42) 135(-155.51,411.42) 136(-175.2,411.42) 137(-194.88,411.42) 138(-214.57,411.42) 139(-234.25,411.42) 140(-253.94,411.42) 141(-273.62,411.42) 142(-293.31,411.42) 143(-312.99,411.42) 144(-332.68,411.42)
  rect 220x220 smd: 145(0,5)
  round 157.48 hole 137.8: 145(0,5)
RES_0603 [mm]
  rect 1.1x1 smd: 1(-0.85,0) 2(0.85,0)
RES_0805 [mm]
  rect 1.3x1.5 smd: 1(-0.95,0) 2(0.95,0)
RES_1206 [mm]
  rect 1.6x1.8 smd: 1(-1.4,0) 2(1.4,0)
  silkscreen extent -0.3,-0.8 0.3,0.8
SJ1-3525NG [mm]
  oval 1.4x2.8 hole 2 slot 0.8 at 0 deg: 1(-0.511,0)
  oval 2.8x1.4 hole 0.8 slot 2 at 0 deg: 2(4.489,-5) 3(4.489,5) 4(4.445,2.54) 5(4.445,-2.54)
  round 1.8 hole 1.2: 6(4.489,0) 7(-3.011,-5) 8(-0.511,-5) 9(-3.011,5) 10(-0.511,5)
  silkscreen extent -5.01,-6 7.19,6
SMBJ36CATR [mm]
  rect 2.2x2.15 smd: 1(-2.2,0) 2(2.2,0)
  silkscreen extent -2.68,-1.81 2.68,1.81, body extent -3.08,-1.81 3.09,1.81, height 2.75
ST1S10 [mm]
  rect 2x0.6 smd: 1(-2.7,1.905) 2(-2.7,0.635) 3(-2.7,-0.635) 4(-2.7,-1.905) 5(2.7,-1.905) 6(2.7,-0.635) 7(2.7,0.635) 8(2.7,1.905)
  rect 2.41x3.3 smd: 9(0,-0.1)
  silkscreen extent -1.32,-2.5 1.32,2.5
STM32H743VIT6 [mm]
  rect 1.6x0.3 smd: 1(-7.7,6) 2(-7.7,5.5) 3(-7.7,5) 4(-7.7,4.5) 5(-7.7,4) 6(-7.7,3.5) 7(-7.7,3) 8(-7.7,2.5) 9(-7.7,2) 10(-7.7,1.5) 11(-7.7,1) 12(-7.7,0.5) 13(-7.7,0) 14(-7.7,-0.5) 15(-7.7,-1) 16(-7.7,-1.5) 17(-7.7,-2) 18(-7.7,-2.5) 19(-7.7,-3) 20(-7.7,-3.5) 21(-7.7,-4) 22(-7.7,-4.5) 23(-7.7,-5) 24(-7.7,-5.5) 25(-7.7,-6) 51(7.7,-6) 52(7.7,-5.5) 53(7.7,-5) 54(7.7,-4.5) 55(7.7,-4) 56(7.7,-3.5) 57(7.7,-3) 58(7.7,-2.5) 59(7.7,-2) 60(7.7,-1.5) 61(7.7,-1) 62(7.7,-0.5) 63(7.7,0) 64(7.7,0.5) 65(7.7,1) 66(7.7,1.5) 67(7.7,2) 68(7.7,2.5) 69(7.7,3) 70(7.7,3.5) 71(7.7,4) 72(7.7,4.5) 73(7.7,5) 74(7.7,5.5) 75(7.7,6)
  rect 0.3x1.6 smd: 26(-6,-7.7) 27(-5.5,-7.7) 28(-5,-7.7) 29(-4.5,-7.7) 30(-4,-7.7) 31(-3.5,-7.7) 32(-3,-7.7) 33(-2.5,-7.7) 34(-2,-7.7) 35(-1.5,-7.7) 36(-1,-7.7) 37(-0.5,-7.7) 38(0,-7.7) 39(0.5,-7.7) 40(1,-7.7) 41(1.5,-7.7) 42(2,-7.7) 43(2.5,-7.7) 44(3,-7.7) 45(3.5,-7.7) 46(4,-7.7) 47(4.5,-7.7) 48(5,-7.7) 49(5.5,-7.7) 50(6,-7.7) 76(6,7.7) 77(5.5,7.7) 78(5,7.7) 79(4.5,7.7) 80(4,7.7) 81(3.5,7.7) 82(3,7.7) 83(2.5,7.7) 84(2,7.7) 85(1.5,7.7) 86(1,7.7) 87(0.5,7.7) 88(0,7.7) 89(-0.5,7.7) 90(-1,7.7) 91(-1.5,7.7) 92(-2,7.7) 93(-2.5,7.7) 94(-3,7.7) 95(-3.5,7.7) 96(-4,7.7) 97(-4.5,7.7) 98(-5,7.7) 99(-5.5,7.7) 100(-6,7.7)
  silkscreen extent -7.92,-6.5 6.5,6.85
TC3528-1411 [mm] "Capacitor, SM Tantalum; Body 3.5 x 2.8 mm (LxW typ)"
  rect 2x2.2 smd: 1(-1.5,0) 2(1.5,0)
  silkscreen extent -2.82,-1.5 1.85,1.63
TRANSF_ACORE [mm]
  rect 1x1.65 smd: 1(-3.3,2.4) 2(-3.3,0) 3(-3.3,-2.4) 4(3.3,-2.4) 5(3.3,0) 6(3.3,2.4)
  rect 1.65x0.76 smd: 7(-1.59,1.27) 8(-1.59,0) 9(-1.59,-1.27) 10(1.59,1.27) 11(1.59,-1.27)
  silkscreen extent -2.61,-3.21 2.61,3.13
TRANSF_ACORE2 [mm]
  rect 1x1.65 smd: 1(-3.3,2.4) 2(-3.3,0) 3(-3.3,-2.4) 4(3.3,-2.4) 5(3.3,0) 6(3.3,2.4)
  rect 1.65x0.76 smd: 7(-1.59,1.27) 8(-1.59,0) 9(-1.59,-1.27) 10(1.59,1.27) 11(1.59,-1.27)
  silkscreen extent -2.61,-3.21 2.61,3.13
TRANSF_ICORE [mm]
  rect 0.9x0.4 smd: 1(-1.39,0.59) 2(1.41,0.59) 3(-1.39,-0.56) 4(1.41,-0.56)
  silkscreen extent -2.04,-0.95 2.04,0.95
W25Q16 [mm]
  rect 2x0.6 smd: 1(-4.7,1.905) 2(-4.7,0.635) 3(-4.7,-0.635) 4(-4.7,-1.905) 5(4.7,-1.905) 6(4.7,-0.635) 7(4.7,0.635) 8(4.7,1.905)
  silkscreen extent -3.2,-2.6 3.2,2.6
WM8731 [mm]
  rect 1.8x0.4 smd: 1(-3.6,4.225) 2(-3.6,3.575) 3(-3.6,2.925) 4(-3.6,2.275) 5(-3.6,1.625) 6(-3.6,0.975) 7(-3.6,0.325) 8(-3.6,-0.325) 9(-3.6,-0.975) 10(-3.6,-1.625) 11(-3.6,-2.275) 12(-3.6,-2.925) 13(-3.6,-3.575) 14(-3.6,-4.225) 15(3.6,-4.225) 16(3.6,-3.575) 17(3.6,-2.925) 18(3.6,-2.275) 19(3.6,-1.625) 20(3.6,-0.975) 21(3.6,-0.325) 22(3.6,0.325) 23(3.6,0.975) 24(3.6,1.625) 25(3.6,2.275) 26(3.6,2.925) 27(3.6,3.575) 28(3.6,4.225)
  silkscreen extent -2.4,-5.2 2.4,5.2

## Part data
B1: library part BR1632A/FA, "BR1632A/FA"
BOOT MIC_IN2: library part 51022-0200, "2 Pin"
C1: library part CAPAE_6.6x6.6h5.4, "CAPAE_6.6x6.6h5.4"
C2 C8 C20 C22 C24 C25 C26 C29 C32 C33 C34 C35 C54 C60: library part CAPAE_4.3x4.3h5.4, "CAPAE_4.3x4.3h5.4"
C3 C4 C5 C6 C7 C9 C10 C11 C12 C13 C14 C15 C16 C17 C18 C19 C21 C23 C27 C28 C30 C31 C36 C37 C38 C39 C40 C41 C42 C43 C44 C45 C46 C47 C48 C49 C50 C51 C52 C53 C55 C56 C57 C58 C59 C61 C62 C63 C65 C67 C69 C70 C71 C72 C73 C74 C76 C78 C79 C81 C82 C83 C84 C86 C87 C88 C89 C90 C91 C92 C93 C94 C95 C96 C97 C98 C99 C104 C107 C112 C113 C114 C115 C116 C117 C118 C119 C120 C121 C122 C123 C124 C127 C134 C135 C136 C137: library part CAP_0805, "CAP_0805"
C64 C66 C68: library part C0805, "C0805"
C75 C77 C80 C85 C126: library part EEEFC_sizeB, "EEEFC_sizeB"
C102 C103 C105 C106: library part CAP_1206, "CAP_1206"
C125: library part EEEFC_sizeB
D29 D30 D31 D34 D35 D36 D37 D38 D39 D40: library part SMLVT3V3, "Diode", Manufacturer_Name=STMicroelectronics, Mouser Part Number=511-SMLVT3V3, RS Part Number=5444821P, Allied_Number=70013736, Allied Price/Stock=http://www.alliedelec.com/stmicroelectronics-smlvt3v3/70013736/, Datasheet Link=http://www.st.com/web/en/resource/technical/document/datasheet/CD00000923.pdf, Height=2.65mm, Manufacturer_Part_Number=SMLVT3V3, Mouser Price/Stock=https://www.mouser.com/Search/Refine.aspx?Keyword=511-SMLVT3V3, RS Price/Stock=http://uk.rs-online.com/web/p/products/5444821P
J1 J2 J3 J5: library part SJ1-3523N
J4: library part 90131-0126, "2*5 Pin"
J6: library part FH12S-45S-0.5SH_55_, "Connector", Manufacturer_Name=Hirose, Manufacturer_Part_Number=FH12S-45S-0.5SH(55), Mouser Part Number=798-FH12S-45S-05SH55, RS Part Number=1620942, Datasheet Link=https://www.hirose.com/product/en/download_file/key_name/FH12S-45S-0.5SH%2855%29/category/Drawing%20(2D)/doc_file_id/43881/?file_category_id=6&item_id=05860665055&is_series=, Height=2mm, Mouser Price/Stock=https://www.mouser.co.uk/ProductDetail/Hirose-Connector/FH12S-45S-05SH55?qs=0N%252BVULUZFj%252BE0LA99Ny0NA%3D%3D, RS Price/Stock=http://uk.rs-online.com/web/p/products/1620942
J8: library part 2-1734035-3, "2-1734035-3"
J9 J10: library part 31-5431, "SMA"
JTAG_FPGA JTAG_STM32: library part IDC10, "2*5 Pin"
L1: library part IND_1812, "IND_1812"
L3 L8: library part IND_FERRITE_BEAD, "Ferrite bead on conductor"
L7: library part IND_1206, "IND_1206"
L37: library part IND_FERRITE_CORE, "Inductor"
PTT_IN SPEAKER: library part 51022-0200, "51022-0200"
R1 R2 R4 R5 R6 R7 R8 R9 R10 R11 R12 R13 R14 R15 R16 R17 R18 R19 R20 R21 R22 R23 R24 R25 R26 R27 R28 R29 R30 R31 R32 R33 R34 R35 R36 R37 R38 R39 R40 R41 R42 R43 R44 R45 R46 R47 R48 R49 R50 R51 R53 R54 R56 R57 R58 R59 R60 R61 R66 R67: library part RES_0805, "RES_0805"
R3: library part RES_0805, "By used crystal"
R62 R63: library part RES_1206, "RES_1206"
R68 R69: library part RES_0603, "RES_0603"
T1: library part TRANSF_ICORE, "Transformer"
T3 T4: library part TRANSF_ACORE2, "Transformer"
T6: library part TRANSF_ACORE, "Transformer"
U5: library part STM32H743VIT6, "STM32H743VIT6"
U8: "Integrated Circuit", Manufacturer_Name="Texas Instruments", Datasheet Link=https://www.ti.com/lit/ds/symlink/dac5674.pdf, Height=1mm, Manufacturer_Part_Number=DAC5674IPHP
U11 U12: library part AMS1117
U13 U18: library part LT1117CST-3.3, "LT1117CST-3.3"
U14: library part LT1117CST-3.3, "LT1117CST-1.8"
U17: library part CMP-0359-03855-2, "Single Channel, Low Noise, Low Distortion Differential ADC Driver for 300 MHz IF, 1800 MHz Typical GBW, 4500 V/us Typical SR, 2.85 to 3.5 V, 16-Pin QFN (UD-16), Industrial, Pb-Free", Linear Technology Part Number=LTC6400-20, Manufacturer="Linear Technology", Channels (#)=1, Code_JEDEC=MO-220, ComponentLink1Description="Manufacturer URL", ComponentLink1URL=http://www.linear.com/, ComponentLink2Description=Datasheet, ComponentLink2URL=http://cds.linear.com/docs/en/datasheet/640020f.pdf, ComponentLink3Description="Package Specification", ComponentLink3URL=http://cds.linear.com/docs/en/packaging/QFN_16_05-08-1691.pdf, GBW (MHz) Typical=1800, Is (mA) Typical=90, Mounting Technology="Surface Mount", PackageDescription="16-Lead Plastic QFN, Body 3.00 x 3.00 mm, Pitch 0.5 mm", PackageReference=LT-UD-16, PartNumber=LTC6400IUD-20#PBF, RevisionNote="URLs updated", RoHS=Pb-Free, SR (V/us) Typical=4500, Type=DIFF, Vos (mV) Typical=2, Vs Max (V)=3.5, Vs Min (V)=2.85
U20: "Integrated Circuit", Manufacturer_Name="Texas Instruments", Mouser Part Number=595-OPA2673IRGVT, RS Part Number=8122587P, Datasheet Link=http://www.ti.com/lit/gpn/opa2673, Height=1mm, Manufacturer_Part_Number=OPA2673IRGVT, Mouser Price/Stock=https://www.mouser.co.uk/ProductDetail/Texas-Instruments/OPA2673IRGVT?qs=xHCJPbHdANbeLKV0FJjs6g%3D%3D, RS Price/Stock=http://uk.rs-online.com/web/p/products/8122587P
XG1: library part NV7050SA, "NV7050SA / VG-4513CA-122.8800M-GGCT3"
XG2: library part 581L200X2ITT, "Crystal or Oscillator", Manufacturer_Name=CTS, Mouser Part Number=774-581L200X2ITT, Datasheet Link=https://componentsearchengine.com/Datasheets/1/581L200X2ITT.pdf, Height=1.65mm, Manufacturer_Part_Number=581L200X2ITT, Mouser Price/Stock=https://www.mouser.com/Search/Refine.aspx?Keyword=774-581L200X2ITT
Y1: "Crystal or Oscillator", Manufacturer_Name=ABRACON, Mouser Part Number=815-ABS25-32.768K6-T, RS Part Number=1712795P, Datasheet Link=http://www.abracon.com/Resonators/abs25.pdf, Manufacturer_Part_Number=ABS25-32.768KHZ-6-T, Mouser Price/Stock=https://www.mouser.co.uk/ProductDetail/ABRACON/ABS25-32768KHZ-6-T?qs=wl%2FhatdkTudHMJeSjMoOzg%3D%3D, RS Price/Stock=http://uk.rs-online.com/web/p/products/1712795P
Y2: library part ECS-200-20-1, "ECS-200-20-1"

## Via types
v1: diameter 1.016, hole 0.486, Top Layer, Top to Bottom Layer, Bottom, tented both sides, 338 vias
v2: diameter 0.5, hole 0.3, Top Layer, Top to Bottom Layer, Bottom, tented both sides, 87 vias
v3: diameter 0.5, hole 0.25, Top Layer, Top to Bottom Layer, Bottom, tented both sides, 39 vias
v4: diameter 1, hole 0.5, Top Layer, Top to Bottom Layer, Bottom, 27 vias
v5: diameter 1.27, hole 0.711, Top Layer, Top to Bottom Layer, Bottom, 15 vias
v6: diameter 1.016, hole 0.486, Top Layer, Top to Bottom Layer, Bottom, 7 vias
v7: diameter 4, hole 3, Top Layer, Top to Bottom Layer, Bottom, 4 vias
v8: diameter 0.5, hole 0.2, Top Layer, Top to Bottom Layer, Bottom, tented both sides, 1 vias

## Nets (pads, with @x,y where several pads share a name; then routed paths per layer and width w, separated by ;. In a path a pad name is that pad's centre, name@x,y a point inside that pad or via, vN(x,y) a via of type N, cw(c..) or ccw(c..) an arc to the next point about the centre after c; other vN are vias at no path point)
5V: C2.1 C6.2 L1.2 L37.2 R2.2 | length 34.2
  Top Layer, Top w0.5: C6.2@150.95,-53.4 C6.2@151.35,-53 ; L1.2@153.3,-58.2 153.325,-58.225 153.325,-60.825 v1(153.35,-60.85) ; C2.1@153.3,-54.5 C2.1@154,-53.8 ; v1(160.111,-73.32) 160.16,-73.272 R2.2@160.16,-71.426
  Top Layer, Top w1: L37.2@150.95,-60.4 150.9,-60.35 150.9,-53.6 C2.1@153.2,-53.6 ; L1.2@153.3,-58.2 C2.1@153.3,-54.5
  Bottom Layer, Bottom w0.5: v1(153.35,-60.85) 153.35,-66.559 160.091,-73.3 v1(160.111,-73.32)
+1V2: C62.1 C68.1 C69.1 C72.1 C74.1 C82.1 C87.1 C91.1 C95.1 C98.1 U10.1 U10.5 U10.29 U10.34 U10.37 U10.38 U10.45 U10.61 U10.70 U10.73 U10.78 U10.84 U10.102 U10.109 U10.116 U10.124 U10.134 U10.138 U12.2 U12.4 | length 162.6
  Top Layer, Top w0.23: U10.102@30.3,-42.8 v1@32,-42.8 ; U10.84@30.3,-33.8 31.587,-33.8 31.987,-33.4 v1(32.2,-33.4) ; U10.78@30.3,-30.8 32.9,-30.8 v1(33.1,-30.6) ; U10.73@30.3,-28.3 30.566,-28.034 33.25,-28.034 U10.70@33.25,-26.35 ; U10.109@32.25,-47.75 32.25,-46.794 32.967,-46.077 35.077,-46.077 v1(35.2,-46.2) 35.413,-46.2 35.71,-46.497 35.75,-46.497 U10.116@35.75,-47.75 ; v1@33.293,-28.077 v1(33.308,-28.092) ; v1(39.7,-46) 39.75,-46.05 U10.124@39.75,-47.75 ; U10.134@44.75,-47.75 44.75,-46.682 v1(45.529,-45.902) 45.974,-46.347 46.283,-46.347 46.75,-46.814 U10.138@46.75,-47.75 ; U10.45@45.75,-26.35 45.75,-27.644 v1(46.265,-28.159) ; v1(48.863,-46.135) 49.075,-46.347 50.475,-46.347 51.022,-45.8 U10.1@51.7,-45.8 ; U10.38@49.25,-26.35 50.45,-26.35 v1(50.6,-26.2) ; v1@49.835,-31.8 U10.29@51.7,-31.8 ; v1(49.9,-44.1) 50.2,-43.8 U10.5@51.7,-43.8
  Top Layer, Top w0.25: U10.61@37.75,-26.35 37.75,-27.75 v1(38.2,-28.2)
  Top Layer, Top w0.3: v1(49.5,-30) 49.637,-29.863 49.637,-29.339 49.676,-29.3 U10.34@51.7,-29.3
  Mid-Layer 2 w0.4: v1(32.2,-33.4) 31.2,-34.4 31.2,-41.8 32,-42.6 v1(32,-42.7) 32,-43 v1(35.2,-46.2) 35.651,-46.651 39.049,-46.651 v1(39.7,-46) 41.033,-47.333 44.8,-47.333 ; v1(33.1,-30.6) 33.308,-30.392 v1(33.308,-28.092) ; v1(38.2,-28.2) 39.763,-26.637 44.743,-26.637 v1(46.265,-28.159) ; v1(45.529,-45.902) 45.529,-46.604 44.8,-47.333 ; 48.8,-26.2 48.719,-26.281 48.719,-28.8 49.5,-29.581 v1(49.5,-30) 50.65,-31.15 ; v1(49.7,-32.1) 50.65,-31.15 ; 44.8,-47.333 47.665,-47.333 v1(48.863,-46.135) 48.863,-44.737 51.2,-42.4 51.2,-31.7 50.65,-31.15
  Mid-Layer 2 w0.5: v1(46.265,-28.159) 48.224,-26.2 48.8,-26.2 v1(50.6,-26.2)
  Mid-Layer 2 w1: v1(50.6,-26.2) 50.8,-26 v5(60.8,-26)
  Bottom Layer, Bottom w0.5: C87.1@28.504,-42.674 v1@32,-42.674 ; v1(33.308,-28.092) 34.378,-27.021 C82.1@34.378,-24.599 C74.1@36.241,-24.599 36.241,-26.241 v1(38.2,-28.2) ; C91.1@35,-47.65 35.2,-47.45 v1(35.2,-46.2) ; C95.1@38.6,-47.65 39.7,-46.55 v1(39.7,-46) ; C98.1@45.2,-47.65 45.529,-47.321 v1(45.529,-45.902) ; v1@49.219,-30 v1(49.5,-30) ; C72.1@49.433,-24.882 49.433,-25.033 v1(50.6,-26.2) ; v1(49.9,-44.1) 50,-44 C62.1@54.1,-44 ; C68.1@58.8,-24.4 59.601,-23.6 C69.1@60.978,-23.599 ; v5(60.8,-26) 60.8,-23.778 C69.1@60.978,-23.599 ; U12.4@65.5,-27.545 65.5,-23.6 ; U12.2@65.5,-21.745 65.5,-23.6 ; C69.1@60.978,-23.599 65.5,-23.6
+2V5: C61.1 C66.1 C67.1 C73.1 C84.1 U10.3 U10.35 U10.75 U10.96 U10.107 U11.2 U11.4 U12.3 | length 129.2
  Top Layer, Top w0.23: v1(27.831,-40.294) 28.325,-39.8 U10.96@30.3,-39.8 ; U10.107@30.3,-45.3 32.109,-45.3 32.009,-45.2 v1(32,-45.2) ; U10.75@30.3,-29.3 31.5,-29.3 v1(31.9,-28.9) ; v1(49.8,-28.3) 50.3,-28.8 U10.35@51.7,-28.8 ; v1(49.9,-45.4) 50.5,-44.8 U10.3@51.7,-44.8
  Mid-Layer 2 w0.4: v1(27.831,-40.294) 30.128,-40.294 ; v1(31.9,-28.9) 30.028,-28.9 27.3,-31.628 27.3,-32.8 30.128,-35.628 30.128,-40.294 ; v1(49.8,-28.3) 52,-30.5 52,-44.866 50.666,-46.2 ; v1(49.9,-45.4) 49.9,-45.434 50.666,-46.2 ; 30.128,-40.294 30.128,-43.328 v1(32,-45.2) 35.2,-48.4 48.466,-48.4 50.666,-46.2
  Mid-Layer 2 w1: v1(49.8,-28.3) 69.932,-28.3 v1(72.167,-26.066)
  Bottom Layer, Bottom w0.23: C84.1@28.408,-29.385 28.469,-29.324 28.893,-28.9 v1(31.9,-28.9) ; C73.1@53.677,-28.3 C73.1@53.804,-28.427 ; v1(72.167,-26.066) 72.2,-26.032 C66.1@72.2,-23.6
  Bottom Layer, Bottom w0.5: v1(49.8,-28.3) C73.1@53.677,-28.3 ; v1(49.9,-45.4) 50.169,-45.669 C61.1@54.205,-45.669 ; U12.3@67.8,-21.745 69.005,-22.95 C67.1@70.25,-22.95 70.9,-23.6 C66.1@72.2,-23.6 72.4,-23.8 76.9,-23.8 ; U11.4@76.9,-27.828 76.9,-23.8 ; U11.2@76.9,-22.028 76.9,-23.8